# EAGLE board snesram (EAGLE 5.06), part 1 of 2
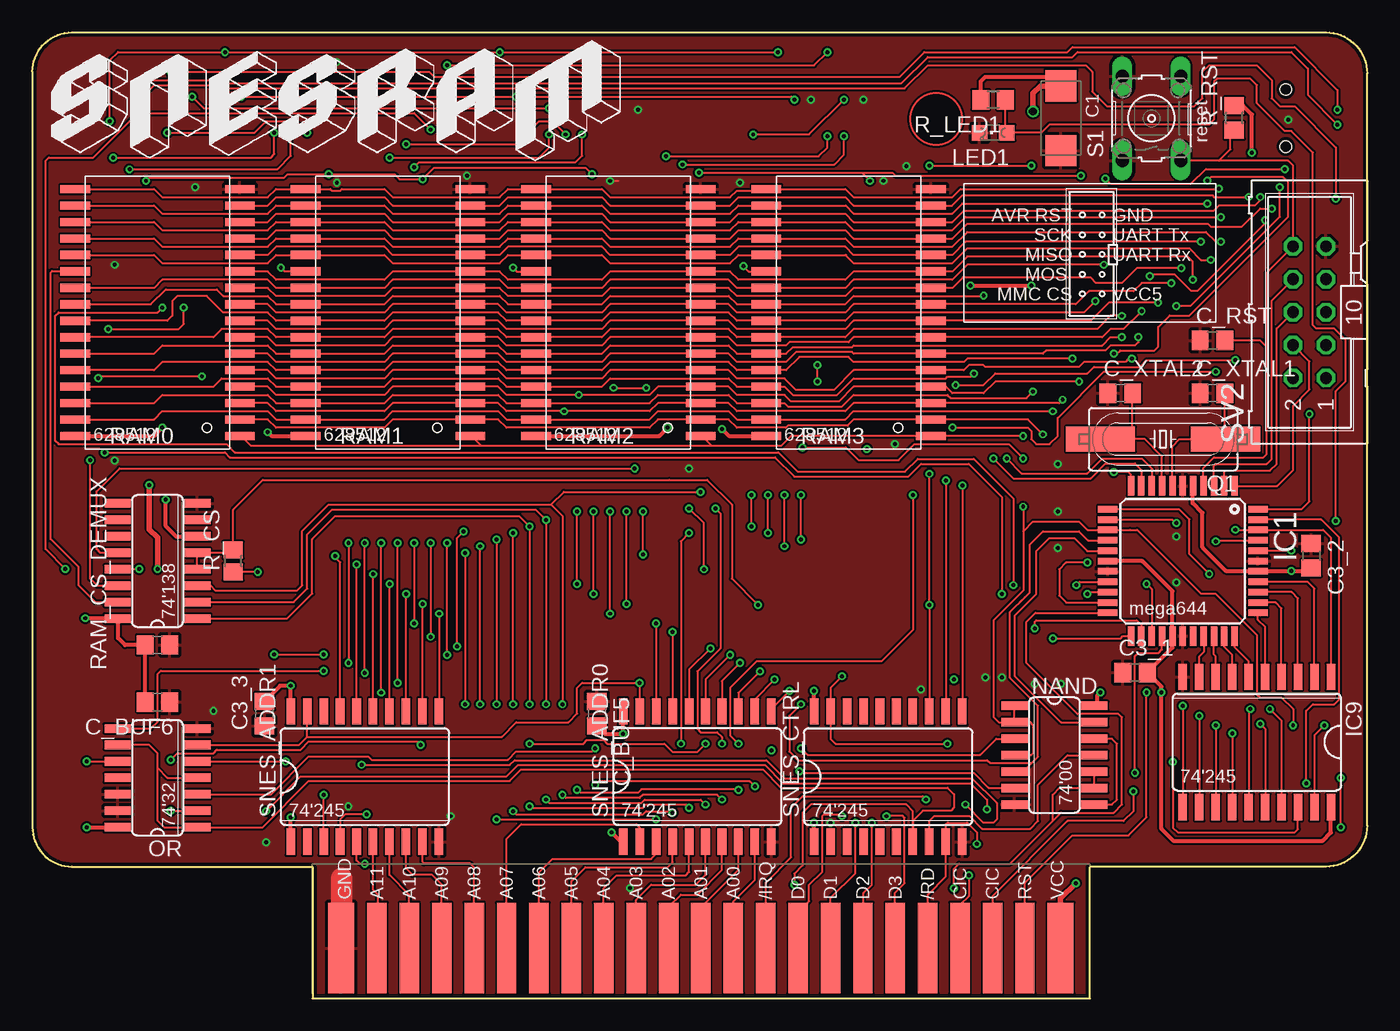
[diagram p0: board, top side]
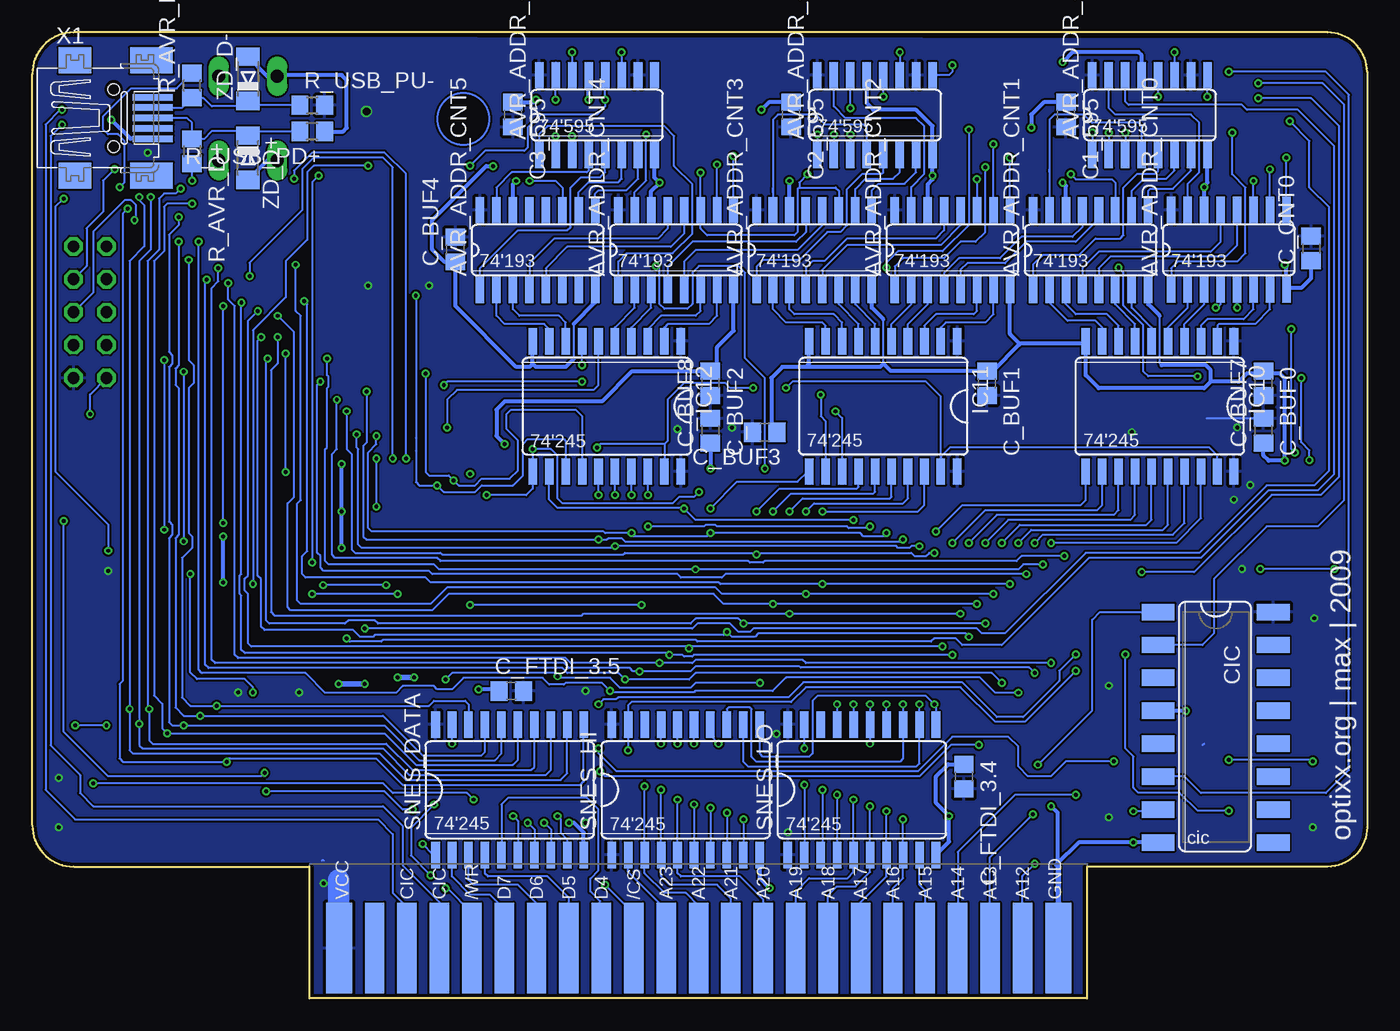
[diagram p1: board, bottom side, seen from below]

Size 103 x 74.55 mm. Coordinates in mm from the lower left corner, seen from the top.
Outline: 103,71.34 103,13.33 arc-90 99.82,10.16 81.66,10.16
Outline: 21.62,10.11 21.62,0 81.6,0 81.6,10.11
Outline: 21.59,10.16 3.05,10.16 arc-90 0,13.21 0,71.5 arc-90 3.05,74.55 99.82,74.55 arc-90 103,71.37
Copper layers (1*16): Top 0.035mm / dielectric 1.5mm / Bottom 0.035mm
Design rules "PropagandaPCB": minimum track width 6mil, minimum drill 10mil, track to track 6mil, track to pad 6mil, pad to pad 6mil, via to via 6mil, smd to smd 6mil, copper to edge 10mil, drill to drill 10mil, minimum pad ring 10mil, minimum via ring 6mil, stop-mask expansion 2mil, vias tented up to drill 100mil, thermal gap 10mil

## Footprints (pad centres in the part's own frame; a part is rotated, then mirrored left to right if it is on the bottom)
SO16 = smd 0.66 x 2.032: 1 -4.445,-3.073; 2 -3.175,-3.073; 3 -1.905,-3.073; 4 -0.635,-3.073; 5 0.635,-3.073; 6 1.905,-3.073; 7 3.175,-3.073; 8 4.445,-3.073; 9 4.445,3.073; 10 3.175,3.073; 11 1.905,3.073; 12 0.635,3.073; 13 -0.635,3.073; 14 -1.905,3.073; 15 -3.175,3.073; 16 -4.445,3.073
SMC_C = smd 2.4 x 2.4: + -2.5,0; - 2.5,0
C0805 = smd 1.3 x 1.5: 1 -0.95,0; 2 0.95,0
DIL16_SMD = smd 1.27 x 2.54: 1 -8.89,-4.445; 2 -6.35,-4.445; 3 -3.81,-4.445; 4 -1.27,-4.445; 5 1.27,-4.445; 6 3.81,-4.445; 7 6.35,-4.445; 8 8.89,-4.445; 9 8.89,4.445; 10 6.35,4.445; 11 3.81,4.445; 12 1.27,4.445; 13 -1.27,4.445; 14 -3.81,4.445; 15 -6.35,4.445; 16 -8.89,4.445
TQFP44 = smd 1.5 x 0.5: 1 -5.8,4; 2 -5.8,3.2; 3 -5.8,2.4; 4 -5.8,1.6; 5 -5.8,0.8; 6 -5.8,0; 7 -5.8,-0.8; 8 -5.8,-1.6; 9 -5.8,-2.4; 10 -5.8,-3.2; 11 -5.8,-4; 23 5.8,-4; 24 5.8,-3.2; 25 5.8,-2.4; 26 5.8,-1.6; 27 5.8,-0.8; 28 5.8,0; 29 5.8,0.8; 30 5.8,1.6; 31 5.8,2.4; 32 5.8,3.2; 33 5.8,4 | smd 0.5 x 1.5: 12 -4,-5.8; 13 -3.2,-5.8; 14 -2.4,-5.8; 15 -1.6,-5.8; 16 -0.8,-5.8; 17 0,-5.8; 18 0.8,-5.8; 19 1.6,-5.8; 20 2.4,-5.8; 21 3.2,-5.8; 22 4,-5.8; 34 4,5.8; 35 3.2,5.8; 36 2.4,5.8; 37 1.6,5.8; 38 0.8,5.8; 39 0,5.8; 40 -0.8,5.8; 41 -1.6,5.8; 42 -2.4,5.8; 43 -3.2,5.8; 44 -4,5.8
SO20W = smd 0.66 x 2.032: 1 -5.715,-5.029; 2 -4.445,-5.029; 3 -3.175,-5.029; 4 -1.905,-5.029; 5 -0.635,-5.029; 6 0.635,-5.029; 7 1.905,-5.029; 8 3.175,-5.029; 9 4.445,-5.029; 10 5.715,-5.029; 11 5.715,5.029; 12 4.445,5.029; 13 3.175,5.029; 14 1.905,5.029; 15 0.635,5.029; 16 -0.635,5.029; 17 -1.905,5.029; 18 -3.175,5.029; 19 -4.445,5.029; 20 -5.715,5.029
CHIPLED_0805 = smd 1.2 x 1.2: A 0,-1.05; C 0,1.05
SO14 = smd 0.66 x 2.032: 1 -3.81,-3.073; 2 -2.54,-3.073; 3 -1.27,-3.073; 4 0,-3.073; 5 1.27,-3.073; 6 2.54,-3.073; 7 3.81,-3.073; 8 3.81,3.073; 9 2.54,3.073; 10 1.27,3.073; 11 0,3.073; 12 -1.27,3.073; 13 -2.54,3.073; 14 -3.81,3.073
HC49UP = smd 5.334 x 1.93: 1 -4.826,0; 2 4.826,0
R0805 = smd 1.3 x 1.5: 1 -0.95,0; 2 0.95,0
R0805' = smd 1.3 x 1.5: 1 -0.85,0; 2 0.85,0
MEMORY-SAMSUNG-2_SOP-32 = smd 0.635 x 2.286: 1 -9.525,-6.35; 2 -8.255,-6.35; 3 -6.985,-6.35; 4 -5.715,-6.35; 5 -4.445,-6.35; 6 -3.175,-6.35; 7 -1.905,-6.35; 8 -0.635,-6.35; 9 0.635,-6.35; 10 1.905,-6.35; 11 3.175,-6.35; 12 4.445,-6.35; 13 5.715,-6.35; 14 6.985,-6.35; 15 8.255,-6.35; 16 9.525,-6.35; 17 9.525,6.35; 18 8.255,6.35; 19 6.985,6.35; 20 5.715,6.35; 21 4.445,6.35; 22 3.175,6.35; 23 1.905,6.35; 24 0.635,6.35; 25 -0.635,6.35; 26 -1.905,6.35; 27 -3.175,6.35; 28 -4.445,6.35; 29 -5.715,6.35; 30 -6.985,6.35; 31 -8.255,6.35; 32 -9.525,6.35
B3F-10XX = drill 1.016 long: 1 -3.251,2.261; 2 3.251,2.261; 3 -3.251,-2.261; 4 3.251,-2.261
ML10 = drill 0.914 octagon: 1 -5.08,-1.27; 2 -5.08,1.27; 3 -2.54,-1.27; 4 -2.54,1.27; 5 0,-1.27; 6 0,1.27; 7 2.54,-1.27; 8 2.54,1.27; 9 5.08,-1.27; 10 5.08,1.27
SNES_CON = smd 2 x 7: 5 2.25,3.5; 27 57.75,3.5 | smd 1.5 x 7: 6 5,3.5; 7 7.5,3.5; 8 10,3.5; 9 12.5,3.5; 10 15,3.5; 11 17.5,3.5; 12 20,3.5; 13 22.5,3.5; 14 25,3.5; 15 27.5,3.5; 16 30,3.5; 17 32.5,3.5; 18 35,3.5; 19 37.5,3.5; 20 40,3.5; 21 42.5,3.5; 22 45,3.5; 23 47.5,3.5; 24 50,3.5; 25 52.5,3.5; 26 55,3.5 | smd 2 x 7 bottom: 36 2.25,3.5; 58 57.75,3.5 | smd 1.5 x 7 bottom: 37 5,3.5; 38 7.5,3.5; 39 10,3.5; 40 12.5,3.5; 41 15,3.5; 42 17.5,3.5; 43 20,3.5; 44 22.5,3.5; 45 25,3.5; 46 27.5,3.5; 47 30,3.5; 48 32.5,3.5; 49 35,3.5; 50 37.5,3.5; 51 40,3.5; 52 42.5,3.5; 53 45,3.5; 54 47.5,3.5; 55 50,3.5; 56 52.5,3.5; 57 55,3.5
CON-CYPRESSINDUSTRIES_32005-201 = smd 0.5 x 3.1: 1 1.6,-9.027; 2 0.8,-9.027; 3 0,-9.027; 4 -0.8,-9.027; 5 -1.6,-9.027 | smd 2 x 2.5: M1 -4.45,-3.027; M2 4.45,-3.027 | smd 2 x 3.3: M3 4.45,-8.928; M4 -4.45,-8.928 | hole 0.9: 2.2,-6.027; -2.2,-6.027
MINIMELF = smd 1.4 x 1.8: A 1.7,0; C -1.7,0

## Placement (x,y rotation side)
AVR_ADDR_CNT0  40193D  [SO16]  10.67,57.77 0 bottom
AVR_ADDR_CNT1  40193D  [SO16]  21.34,57.75 0 bottom
AVR_ADDR_CNT2  40193D  [SO16]  32,57.75 0 bottom
AVR_ADDR_CNT3  40193D  [SO16]  42.67,57.75 0 bottom
AVR_ADDR_CNT4  40193D  [SO16]  53.34,57.75 0 bottom
AVR_ADDR_CNT5  40193D  [SO16]  64.01,57.75 0 bottom
AVR_ADDR_SREG0  74HCT595D  [SO16]  16.76,68.17 0 bottom
AVR_ADDR_SREG1  74HCT595D  [SO16]  37.97,68.17 0 bottom
AVR_ADDR_SREG2  74HCT595D  [SO16]  59.44,68.17 0 bottom
C1  [SMC_C]  79.38,67.91 270 top
C1_595  100n  [C0805]  23.24,68.2 270 bottom
C2_595  100n  [C0805]  44.45,68.2 270 bottom
C3_1  100n  [C0805]  85.09,25.15 0 top
C3_2  100n  [C0805]  98.68,34.16 270 top
C3_3  100n  [C0805]  17.91,21.97 90 top
C3_595  100n  [C0805]  65.91,68.2 270 bottom
C_BUF0  100n  [C0805]  8,47.47 270 bottom
C_BUF1  100n  [C0805]  29.34,47.47 270 bottom
C_BUF2  100n  [C0805]  50.67,47.47 270 bottom
C_BUF3  100n  [C0805]  46.48,43.69 180 bottom
C_BUF4  100n  [C0805]  70.36,57.78 90 bottom
C_BUF5  100n  [C0805]  43.56,21.97 270 top
C_BUF6  100n  [C0805]  9.65,22.86 180 top
C_BUF7  100n  [C0805]  8,43.81 90 bottom
C_BUF8  100n  [C0805]  50.67,43.81 90 bottom
C_CNT0  100n  [C0805]  4.32,57.88 90 bottom
C_DEMUX  100n  [C0805]  9.65,27.27 180 top
C_FTDI_3.4  100n  [C0805]  31.11,17.11 270 bottom
C_FTDI_3.5  100n  [C0805]  66.04,23.72 0 bottom
C_RST  47n  [C0805]  91.06,50.77 0 top
C_XTAL1  22p  [C0805]  91.06,46.7 0 top
C_XTAL2  22p  [C0805]  83.95,46.7 0 top
CIC  DIL16_SMD  [DIL16_SMD]  11.68,20.92 270 bottom
IC1  ATMEGA644A  [TQFP44]  88.77,33.75 270 top
IC9  74LS245DW  [SO20W]  94.49,19.78 180 top
IC10  74LS245DW  [SO20W]  16,45.69 180 bottom
IC11  74LS245DW  [SO20W]  37.34,45.69 180 bottom
IC12  74LS245DW  [SO20W]  58.67,45.69 180 bottom
LED1  2-4mA  [CHIPLED_0805]  74.14,66.8 90 top
NAND  74S00D  [SO14]  78.87,18.76 270 top
OR  74HC32D  [SO14]  9.65,17.02 90 top
Q1  20MHz  [HC49UP]  87.25,43.15 180 top
R_AVR_D+  68  [R0805]  90.68,65.37 270 bottom
R_AVR_D-  68  [R0805]  90.68,70.45 90 bottom
R_CS  200  [R0805']  15.49,33.75 90 top
R_LED1  1k6  [R0805]  74.14,69.34 180 top
R_RST  4k7  [R0805]  92.74,67.94 90 top
R_USB_PD+  1M  [R0805]  81.41,66.9 180 bottom
R_USB_PU-  1k5  [R0805]  81.41,68.93 0 bottom
RAM0  KM628512-XX  [MEMORY-SAMSUNG-2_SOP-32]  9.65,52.93 90 top
RAM1  KM628512-XX  [MEMORY-SAMSUNG-2_SOP-32]  27.43,52.93 90 top
RAM2  KM628512-XX  [MEMORY-SAMSUNG-2_SOP-32]  45.21,52.93 90 top
RAM3  KM628512-XX  [MEMORY-SAMSUNG-2_SOP-32]  62.99,52.93 90 top
RAM_CS_DEMUX  74LS138D  [SO16]  9.65,33.75 90 top
S1  [B3F-10XX]  86.36,67.91 90 top
SNES_ADDR0  74LS245DW  [SO20W]  51.31,17.11 0 top
SNES_ADDR1  74LS245DW  [SO20W]  25.65,17.11 0 top
SNES_CTRL  74LS245DW  [SO20W]  66.04,17.11 0 top
SNES_DATA  74LS245DW  [SO20W]  66.17,16.1 0 bottom
SNES_HI  74LS245DW  [SO20W]  52.58,16.1 0 bottom
SNES_LO  74LS245DW  [SO20W]  38.99,16.1 0 bottom
SV2  [ML10]  98.55,52.96 90 top
U$3  SNES_CON_FRONT  [SNES_CON]  21.59,0.38 0 top
X1  MINI-USB  [CON-CYPRESSINDUSTRIES_32005-201]  102.74,67.94 90 bottom
ZD_D+  3.6V  [MINIMELF]  86.36,64.86 270 bottom
ZD_D-  3.6V  [MINIMELF]  86.36,70.96 90 bottom

## Library data of the parts
AVR_ADDR_CNT0 AVR_ADDR_CNT1-AVR_ADDR_CNT5 = 40xx
AVR_ADDR_SREG0 AVR_ADDR_SREG1 AVR_ADDR_SREG2 IC9-IC12 OR RAM_CS_DEMUX SNES_ADDR0 SNES_ADDR1 SNES_CTRL SNES_DATA SNES_HI SNES_LO = 74xx-eu
C1 C1_595 C2_595 C3_1-C3_3 C3_595 C_BUF0 C_BUF1-C_BUF8 C_CNT0 C_DEMUX C_FTDI_3.4 C_FTDI_3.5 C_RST C_XTAL1 C_XTAL2 R_AVR_D+ R_AVR_D- R_LED1 R_RST R_USB_PD+ R_USB_PU- = rcl
CIC = ic-package
IC1 = atmel
LED1 = led
NAND = 74xx-us
Q1 = crystal
R_CS = resistor
RAM0 RAM1-RAM3 X1 = snesram
S1 = switch-omron
SV2 = con-harting-ml
U$3 = snes_con
ZD_D+ ZD_D- = diode

## Nets
A0: IC10.16 RAM0.12 RAM1.12 RAM2.12 RAM3.12 SNES_ADDR0.11
A1: IC10.15 RAM0.11 RAM1.11 RAM2.11 RAM3.11 SNES_ADDR0.12
A2: IC10.17 RAM0.10 RAM1.10 RAM2.10 RAM3.10 SNES_ADDR0.13
A3: IC10.18 RAM0.9 RAM1.9 RAM2.9 RAM3.9 SNES_ADDR0.14
A4: IC10.12 RAM0.8 RAM1.8 RAM2.8 RAM3.8 SNES_ADDR0.15
A5: IC10.11 RAM0.7 RAM1.7 RAM2.7 RAM3.7 SNES_ADDR0.16
A6: IC10.13 RAM0.6 RAM1.6 RAM2.6 RAM3.6 SNES_ADDR0.17
A7: IC10.14 RAM0.5 RAM1.5 RAM2.5 RAM3.5 SNES_ADDR0.18
A8: IC11.16 RAM0.27 RAM1.27 RAM2.27 RAM3.27 SNES_ADDR1.11
A9: IC11.15 RAM0.26 RAM1.26 RAM2.26 RAM3.26 SNES_ADDR1.12
A10: IC11.17 RAM0.23 RAM1.23 RAM2.23 RAM3.23 SNES_ADDR1.13
A11: IC11.18 RAM0.25 RAM1.25 RAM2.25 RAM3.25 SNES_ADDR1.14
A12: IC11.12 RAM0.4 RAM1.4 RAM2.4 RAM3.4 SNES_ADDR1.15
A13: IC11.11 RAM0.28 RAM1.28 RAM2.28 RAM3.28 SNES_ADDR1.16
A14: IC11.13 RAM0.3 RAM1.3 RAM2.3 RAM3.3 SNES_ADDR1.17
A15: IC11.14 RAM0.31 RAM1.31 RAM2.31 RAM3.31 SNES_HI.11 SNES_LO.11
A16: IC12.16 RAM0.2 RAM1.2 RAM2.2 RAM3.2 SNES_HI.12 SNES_LO.12
A17: IC12.15 RAM0.30 RAM1.30 RAM2.30 RAM3.30 SNES_HI.13 SNES_LO.13
A18: IC12.17 RAM0.1 RAM1.1 RAM2.1 RAM3.1 SNES_HI.14 SNES_LO.14
A19: IC12.18 RAM_CS_DEMUX.1 SNES_HI.15 SNES_LO.15
A20: IC12.12 RAM_CS_DEMUX.2 SNES_HI.16 SNES_LO.16
A21: IC12.11 RAM_CS_DEMUX.3 SNES_HI.17 SNES_LO.17
AVR/SNES_SW: IC1.14 IC9.19 IC10.19 IC11.19 IC12.19 NAND.1 NAND.2 NAND.4
AVR/SNES_SW_INV: OR.6 SNES_ADDR0.19 SNES_ADDR1.19 SNES_CTRL.19 SNES_DATA.19
AVR_ADDR_DWN: AVR_ADDR_CNT0.4 IC1.20
AVR_ADDR_LATCH: AVR_ADDR_SREG0.12 AVR_ADDR_SREG1.12 AVR_ADDR_SREG2.12 IC1.25
AVR_ADDR_LOAD: AVR_ADDR_CNT0.11 AVR_ADDR_CNT1.11 AVR_ADDR_CNT2.11 AVR_ADDR_CNT3.11 AVR_ADDR_CNT4.11 AVR_ADDR_CNT5.11 IC1.21
AVR_ADDR_SCK: AVR_ADDR_SREG0.11 AVR_ADDR_SREG1.11 AVR_ADDR_SREG2.11 IC1.24
AVR_ADDR_SER: AVR_ADDR_SREG0.14 IC1.23
AVR_ADDR_UP: AVR_ADDR_CNT0.5 IC1.19
AVR_CS/: IC1.40 R_CS.1
AVR_D0: IC1.37 IC9.2
AVR_D1: IC1.36 IC9.3
AVR_D2: IC1.35 IC9.4
AVR_D3: IC1.34 IC9.5
AVR_D4: IC1.33 IC9.6
AVR_D5: IC1.32 IC9.7
AVR_D6: IC1.31 IC9.8
AVR_D7: IC1.30 IC9.9
AVR_D+: R_AVR_D+.1 R_USB_PD+.2 X1.3 ZD_D+.C
AVR_D-: R_AVR_D-.1 R_USB_PU-.1 X1.2 ZD_D-.C
AVR_RD/: IC1.42 IC9.1 IC12.7
AVR_SNES_WR_EN: IC1.16 NAND.13
AVR_UART_RX: IC1.9 SV2.5
AVR_UART_TX: IC1.10 SV2.7
AVR_WR/: IC1.41 IC12.6
CS/: R_CS.2 RAM_CS_DEMUX.4 RAM_CS_DEMUX.5 SNES_CTRL.13
CS_RAM0: RAM0.22 RAM_CS_DEMUX.15
CS_RAM1: RAM1.22 RAM_CS_DEMUX.14
CS_RAM2: RAM2.22 RAM_CS_DEMUX.13
CS_RAM3: RAM3.22 RAM_CS_DEMUX.12
D0: IC9.18 RAM0.13 RAM1.13 RAM2.13 RAM3.13 SNES_DATA.11
D1: IC9.17 RAM0.14 RAM1.14 RAM2.14 RAM3.14 SNES_DATA.12
D2: IC9.16 RAM0.15 RAM1.15 RAM2.15 RAM3.15 SNES_DATA.13
D3: IC9.15 RAM0.17 RAM1.17 RAM2.17 RAM3.17 SNES_DATA.14
D4: IC9.14 RAM0.18 RAM1.18 RAM2.18 RAM3.18 SNES_DATA.15
D5: IC9.13 RAM0.19 RAM1.19 RAM2.19 RAM3.19 SNES_DATA.16
D6: IC9.12 RAM0.20 RAM1.20 RAM2.20 RAM3.20 SNES_DATA.17
D7: IC9.11 RAM0.21 RAM1.21 RAM2.21 RAM3.21 SNES_DATA.18
GND: AVR_ADDR_CNT0.8 AVR_ADDR_CNT0.14 AVR_ADDR_CNT1.8 AVR_ADDR_CNT1.14 AVR_ADDR_CNT2.8 AVR_ADDR_CNT2.14 AVR_ADDR_CNT3.8 AVR_ADDR_CNT3.14 AVR_ADDR_CNT4.8 AVR_ADDR_CNT4.14 AVR_ADDR_CNT5.8 AVR_ADDR_CNT5.14 AVR_ADDR_SREG0.8 AVR_ADDR_SREG0.13 AVR_ADDR_SREG1.8 AVR_ADDR_SREG1.13 AVR_ADDR_SREG2.8 AVR_ADDR_SREG2.13 C1.- C1_595.1 C2_595.1 C3_1.1 C3_2.1 C3_3.1 C3_595.1 C_BUF0.1 C_BUF1.1 C_BUF2.1 C_BUF3.1 C_BUF4.1 C_BUF5.1 C_BUF6.1 C_BUF7.1 C_BUF8.1 C_CNT0.1 C_DEMUX.1 C_FTDI_3.4.1 C_FTDI_3.5.1 C_RST.1 C_XTAL1.1 C_XTAL2.1 CIC.4 CIC.8 IC1.6 IC1.18 IC1.28 IC1.39 IC9.10 IC10.10 IC11.10 IC12.10 LED1.C NAND.7 OR.7 OR.12 OR.13 R_USB_PD+.1 RAM0.16 RAM1.16 RAM2.16 RAM3.16 RAM_CS_DEMUX.8 S1.1 S1.2 SNES_ADDR0.10 SNES_ADDR1.10 SNES_CTRL.10 SNES_DATA.10 SNES_HI.10 SNES_LO.10 SV2.9 U$3.5 U$3.36 X1.5 ZD_D+.A ZD_D-.A
HI/LOROM_SW: IC1.15 NAND.5 OR.2
HI/LOROM_SW_INV: OR.8 SNES_HI.19
ISP_MISO: IC1.2 SV2.6
ISP_MOSI: IC1.1 SV2.4
ISP_RST: C_RST.2 IC1.4 R_RST.1 S1.3 SV2.10
ISP_SCK: IC1.3 SV2.8
LED: IC1.26 LED1.A R_LED1.1
MMC_CS: IC1.44 SV2.2
N1337: OR.3 SNES_LO.19
N$1: AVR_ADDR_CNT0.7 IC10.2
N$2: AVR_ADDR_CNT2.3 IC11.4
N$3: AVR_ADDR_CNT0.2 IC10.5
N$4: AVR_ADDR_CNT0.3 IC10.4
N$5: AVR_ADDR_CNT1.7 IC10.6
N$6: AVR_ADDR_CNT1.6 IC10.7
N$7: AVR_ADDR_CNT1.2 IC10.9
N$8: AVR_ADDR_CNT1.3 IC10.8
N$9: AVR_ADDR_CNT0.12 AVR_ADDR_CNT1.5
N$10: AVR_ADDR_CNT0.13 AVR_ADDR_CNT1.4
N$11: AVR_ADDR_SREG0.9 AVR_ADDR_SREG1.14
N$12: AVR_ADDR_CNT0.15 AVR_ADDR_SREG0.15
N$13: AVR_ADDR_CNT0.1 AVR_ADDR_SREG0.1
N$14: AVR_ADDR_CNT0.10 AVR_ADDR_SREG0.2
N$15: AVR_ADDR_CNT0.9 AVR_ADDR_SREG0.3
N$16: AVR_ADDR_CNT1.15 AVR_ADDR_SREG0.4
N$17: AVR_ADDR_CNT1.1 AVR_ADDR_SREG0.5
N$18: AVR_ADDR_CNT1.10 AVR_ADDR_SREG0.6
N$19: AVR_ADDR_CNT1.9 AVR_ADDR_SREG0.7
N$20: AVR_ADDR_CNT3.9 AVR_ADDR_SREG1.7
N$21: AVR_ADDR_CNT2.1 AVR_ADDR_SREG1.1
N$22: AVR_ADDR_CNT2.10 AVR_ADDR_SREG1.2
N$23: AVR_ADDR_CNT2.9 AVR_ADDR_SREG1.3
N$24: AVR_ADDR_CNT1.12 AVR_ADDR_CNT2.5
N$25: AVR_ADDR_CNT1.13 AVR_ADDR_CNT2.4
N$26: AVR_ADDR_CNT2.2 IC11.5
N$27: AVR_ADDR_CNT2.6 IC11.3
N$28: AVR_ADDR_CNT2.7 IC11.2
N$29: AVR_ADDR_CNT4.3 IC12.4
N$30: AVR_ADDR_CNT3.15 AVR_ADDR_SREG1.4
N$31: AVR_ADDR_CNT3.1 AVR_ADDR_SREG1.5
N$32: AVR_ADDR_CNT3.10 AVR_ADDR_SREG1.6
N$33: AVR_ADDR_CNT3.3 IC11.8
N$34: AVR_ADDR_CNT3.2 IC11.9
N$35: AVR_ADDR_CNT3.6 IC11.7
N$36: AVR_ADDR_CNT3.7 IC11.6
N$37: AVR_ADDR_CNT2.15 AVR_ADDR_SREG1.15
N$38: AVR_ADDR_SREG1.9 AVR_ADDR_SREG2.14
N$39: AVR_ADDR_CNT2.12 AVR_ADDR_CNT3.5
N$40: AVR_ADDR_CNT2.13 AVR_ADDR_CNT3.4
N$41: AVR_ADDR_CNT3.12 AVR_ADDR_CNT4.5
N$42: AVR_ADDR_CNT3.13 AVR_ADDR_CNT4.4
N$43: AVR_ADDR_CNT4.2 IC12.5
N$44: AVR_ADDR_CNT4.6 IC12.3
N$45: AVR_ADDR_CNT4.7 IC12.2
N$46: NAND.8 NAND.12
N$47: AVR_ADDR_CNT4.12 AVR_ADDR_CNT5.5
N$48: AVR_ADDR_CNT4.13 AVR_ADDR_CNT5.4
N$49: AVR_ADDR_CNT5.3 IC12.8
N$50: AVR_ADDR_CNT5.2 IC12.9
N$51: NAND.3 OR.5
N$52: NAND.11 SNES_CTRL.8
N$53: AVR_ADDR_CNT4.15 AVR_ADDR_SREG2.15
N$54: AVR_ADDR_CNT4.1 AVR_ADDR_SREG2.1
N$55: AVR_ADDR_CNT4.10 AVR_ADDR_SREG2.2
N$56: AVR_ADDR_CNT4.9 AVR_ADDR_SREG2.3
N$57: AVR_ADDR_CNT5.15 AVR_ADDR_SREG2.4
N$58: AVR_ADDR_CNT5.1 AVR_ADDR_SREG2.5
N$59: AVR_ADDR_CNT5.10 AVR_ADDR_SREG2.6
N$60: AVR_ADDR_CNT5.9 AVR_ADDR_SREG2.7
N$61: IC1.13 R_AVR_D-.2
N$62: IC1.11 R_AVR_D+.2
N$63: C_XTAL2.2 IC1.8 Q1.2
N$64: AVR_ADDR_CNT0.6 IC10.3
N$65: NAND.6 OR.10
N$68: C_XTAL1.2 IC1.7 Q1.1
OE/: IC12.13 RAM0.24 RAM1.24 RAM2.24 RAM3.24 SNES_CTRL.11
SNES_PIN06_A11: SNES_ADDR1.6 U$3.6
SNES_PIN07_A10: SNES_ADDR1.7 U$3.7
SNES_PIN08_A9: SNES_ADDR1.8 U$3.8
SNES_PIN09_A8: SNES_ADDR1.9 U$3.9
SNES_PIN10_A7: SNES_ADDR0.2 U$3.10
SNES_PIN11_A6: SNES_ADDR0.3 U$3.11
SNES_PIN12_A5: SNES_ADDR0.4 U$3.12
SNES_PIN13_A4: SNES_ADDR0.5 U$3.13
SNES_PIN14_A3: SNES_ADDR0.6 U$3.14
SNES_PIN15_A2: SNES_ADDR0.7 U$3.15
SNES_PIN16_A1: SNES_ADDR0.8 U$3.16
SNES_PIN17_A0: SNES_ADDR0.9 U$3.17
SNES_PIN18_/IRQ: IC1.43 U$3.18
SNES_PIN19_D0: SNES_DATA.9 U$3.19
SNES_PIN20_D1: SNES_DATA.8 U$3.20
SNES_PIN21_D2: SNES_DATA.7 U$3.21
SNES_PIN22_D3: SNES_DATA.6 U$3.22
SNES_PIN23_/RD: SNES_CTRL.9 SNES_DATA.1 U$3.23
SNES_PIN24_CICO1: CIC.1 U$3.24
SNES_PIN25_CICI7: CIC.7 U$3.25
SNES_PIN37_A12: SNES_ADDR1.5 U$3.37
SNES_PIN38_A13: SNES_ADDR1.4 U$3.38
SNES_PIN39_A14: SNES_ADDR1.3 U$3.39
SNES_PIN40_A15: SNES_LO.9 U$3.40
SNES_PIN41_BA0: SNES_HI.9 SNES_LO.8 U$3.41
SNES_PIN42_BA1: SNES_HI.8 SNES_LO.7 U$3.42
SNES_PIN43_BA2: SNES_HI.7 SNES_LO.6 U$3.43
SNES_PIN44_BA3: SNES_HI.6 SNES_LO.5 U$3.44
SNES_PIN45_BA4: SNES_HI.5 SNES_LO.4 U$3.45
SNES_PIN46_BA5: SNES_HI.4 SNES_LO.3 U$3.46
SNES_PIN47_BA6: SNES_HI.3 SNES_LO.2 U$3.47
SNES_PIN48_BA7: SNES_HI.2 U$3.48
SNES_PIN49_/CS: OR.1 OR.4 OR.9 SNES_CTRL.7 U$3.49
SNES_PIN50_D4: SNES_DATA.5 U$3.50
SNES_PIN51_D5: SNES_DATA.4 U$3.51
SNES_PIN52_D6: SNES_DATA.3 U$3.52
SNES_PIN53_D7: SNES_DATA.2 U$3.53
SNES_PIN54_/WR: IC1.22 NAND.9 NAND.10 U$3.54
SNES_PIN55_CICO2: CIC.2 U$3.55
SNES_PIN56_CICI6: CIC.6 U$3.56
SNES_PIN_26_RST: IC1.12 U$3.26
VCC: AVR_ADDR_CNT0.16 AVR_ADDR_CNT1.16 AVR_ADDR_CNT2.16 AVR_ADDR_CNT3.16 AVR_ADDR_CNT4.16 AVR_ADDR_CNT5.16 AVR_ADDR_SREG0.10 AVR_ADDR_SREG0.16 AVR_ADDR_SREG1.10 AVR_ADDR_SREG1.16 AVR_ADDR_SREG2.10 AVR_ADDR_SREG2.16 C1.+ C1_595.2 C2_595.2 C3_1.2 C3_2.2 C3_3.2 C3_595.2 C_BUF0.2 C_BUF1.2 C_BUF2.2 C_BUF3.2 C_BUF4.2 C_BUF5.2 C_BUF6.2 C_BUF7.2 C_BUF8.2 C_CNT0.2 C_DEMUX.2 C_FTDI_3.4.2 C_FTDI_3.5.2 CIC.16 IC1.5 IC1.17 IC1.27 IC1.38 IC9.20 IC10.1 IC10.20 IC11.1 IC11.20 IC12.1 IC12.20 NAND.14 OR.14 R_LED1.2 R_RST.2 R_USB_PU-.2 RAM0.32 RAM1.32 RAM2.32 RAM3.32 RAM_CS_DEMUX.6 RAM_CS_DEMUX.16 SNES_ADDR0.1 SNES_ADDR0.20 SNES_ADDR1.1 SNES_ADDR1.20 SNES_CTRL.1 SNES_CTRL.20 SNES_DATA.20 SNES_HI.1 SNES_HI.20 SNES_LO.1 SNES_LO.20 SV2.1 U$3.27 U$3.58
WE/: IC12.14 RAM0.29 RAM1.29 RAM2.29 RAM3.29 SNES_CTRL.12

## Tracks (layer width: path | path; a pad name or v marks a point on that pad's centre or on a via)
A0  (via drill 0.3, 0.3 pad 0.61)
  Top 0.152: v90.17,58.39 72.01,58.39 70.99,57.37 RAM3.12 63.37,57.37 62.74,58.01 54.48,58.01 53.85,57.37 RAM2.12 44.58,57.37 43.94,58.01 36.7,58.01 36.07,57.37 RAM1.12 27.81,57.37 27.18,58.01 18.8,58.01 18.16,57.37 RAM0.12 | v26.92,23.59 v26.92,35.15 | SNES_ADDR0.11 57.02,22.32 v58.42,23.72
  Bottom 0.152: v90.17,58.39 90.17,25.37 89.92,25.11 81.92,25.11 80.39,23.59 74.93,23.59 74.42,24.1 72.01,24.1 71.75,23.84 70.61,23.84 69.72,24.73 63.63,24.73 63.12,24.22 61.98,24.22 61.85,24.35 59.05,24.35 v58.42,23.72 58.33,23.62 51.94,23.62 51.85,23.72 45.88,23.72 44.83,24.76 29.88,24.76 28.7,23.59 v26.92,23.59 | IC10.16 15.37,36.54 15.75,36.16 25.91,36.16 v26.92,35.15
A1  (via drill 0.3, 0.3 pad 0.61)
  Top 0.152: v89.53,55.47 89.53,56.86 89.15,57.24 72.14,57.24 70.99,56.1 RAM3.11 63.37,56.1 62.74,55.47 54.48,55.47 53.85,56.1 RAM2.11 44.58,56.1 43.94,55.47 36.7,55.47 36.07,56.1 RAM1.11 27.81,56.1 27.18,55.47 18.8,55.47 18.16,56.1 RAM0.11 | v28.19,24.35 v28.19,35.15 | SNES_ADDR0.12 55.75,23.08 v57.28,24.61
  Bottom 0.152: v89.53,55.47 89.66,55.34 89.66,25.75 89.41,25.49 62.1,25.49 61.72,25.11 57.78,25.11 v57.28,24.61 52.32,24.61 51.82,25.11 28.96,25.11 v28.19,24.35 | IC10.15 16.64,36.92 17.02,36.54 26.8,36.54 v28.19,35.15
A2  (via drill 0.3, 0.3 pad 0.61)
  Top 0.152: v88.65,56.36 85.22,56.36 84.07,55.21 82.07,55.21 81.66,55.63 71.79,55.63 70.99,54.83 RAM3.10 63.37,54.83 62.74,54.2 54.36,54.2 53.72,54.83 RAM2.10 44.58,54.83 43.94,54.2 36.7,54.2 36.07,54.83 RAM1.10 27.81,54.83 27.18,54.2 18.8,54.2 18.16,54.83 RAM0.10 | v25.65,25.11 v25.65,35.15 | SNES_ADDR0.13 54.48,23.59 v56.13,25.24
  Bottom 0.152: v88.65,56.36 88.65,55.34 89.15,54.83 89.15,26.13 88.9,25.88 61.98,25.88 61.59,25.49 56.9,25.49 56.64,25.24 v56.13,25.24 52.2,25.24 51.82,25.62 43.81,25.62 43.72,25.53 26.07,25.53 v25.65,25.11 | IC10.17 14.1,36.67 14.99,35.78 25.02,35.78 v25.65,35.15
A3  (via drill 0.3, 0.3 pad 0.61)
  Top 0.152: v87.88,55.21 85.6,55.21 84.96,54.58 81.53,54.58 80.52,53.56 RAM3.9 63.37,53.56 62.74,52.93 54.36,52.93 53.72,53.56 RAM2.9 44.58,53.56 43.94,52.93 36.58,52.93 35.94,53.56 RAM1.9 27.81,53.56 27.18,52.93 18.8,52.93 18.16,53.56 RAM0.9 | v24.38,35.15 v24.38,25.88 | SNES_ADDR0.14 53.21,24.48 v54.61,25.88
  Bottom 0.152: v87.88,55.21 87.88,53.94 87.38,53.43 87.38,26.51 87.12,26.26 61.85,26.26 61.47,25.88 v54.61,25.88 52.07,25.88 51.82,26.13 43.56,26.13 43.31,25.88 v24.38,25.88 | v24.38,35.15 14.73,35.15 12.83,37.05 IC10.18
A4  (via drill 0.3, 0.3 pad 0.61)
  Top 0.152: v86.87,53.69 83.06,53.69 81.66,52.29 RAM3.8 63.37,52.29 62.74,51.66 54.36,51.66 53.72,52.29 RAM2.8 44.58,52.29 43.94,51.66 36.58,51.66 35.94,52.29 RAM1.8 27.81,52.29 27.18,51.66 18.8,51.66 18.16,52.29 RAM0.8 | v32,26.51 v32,35.15 | 53.72,26.51 v53.85,26.51 51.94,24.61 SNES_ADDR0.15
  Bottom 0.152: 86.87,53.82 v86.87,53.69 86.87,32.73 87,32.61 87,31.21 86.87,31.08 86.87,26.89 86.61,26.64 53.98,26.64 v53.85,26.51 52.83,26.51 52.7,26.38 52.07,26.38 51.94,26.51 v32,26.51 | IC10.12 20.45,38.07 20.83,37.69 29.46,37.69 v32,35.15
A5  (via drill 0.3, 0.3 pad 0.61)
  Top 0.152: v85.6,53.05 84.2,51.66 83.19,51.66 82.55,51.02 RAM3.7 63.37,51.02 62.99,50.64 58.42,50.64 58.17,50.39 54.36,50.39 53.72,51.02 RAM2.7 44.58,51.02 43.94,50.39 36.58,50.39 35.94,51.02 RAM1.7 27.81,51.02 27.18,50.39 18.8,50.39 18.16,51.02 RAM0.7 | v33.27,36.04 32.77,35.53 v32.77,27.15 | SNES_ADDR0.16 50.67,25.37 v52.32,27.02
  Bottom 0.152: v32.77,27.15 52.2,27.15 v52.32,27.02 52.32,27.15 86.11,27.15 86.36,27.4 86.36,31.21 86.61,31.46 86.61,32.38 86.36,32.64 86.36,52.29 v85.6,53.05 | IC10.11 21.72,38.45 22.1,38.07 31.24,38.07 v33.27,36.04
A6  (via drill 0.3, 0.3 pad 0.61)
  Top 0.152: v85.34,51.02 85.34,50.64 85.09,50.39 83.19,50.39 82.8,50.01 78.23,50.01 77.98,49.75 RAM3.6 63.37,49.75 63.25,49.88 58.93,49.88 58.17,49.12 54.36,49.12 53.72,49.75 RAM2.6 44.58,49.75 43.94,49.12 36.58,49.12 35.94,49.75 RAM1.6 27.81,49.75 27.18,49.12 18.8,49.12 18.16,49.75 RAM0.6 | v30.73,35.15 v30.73,27.91 | v49.4,28.29 SNES_ADDR0.17
  Bottom 0.152: v85.34,51.02 85.6,50.77 85.6,32.61 85.34,32.35 85.34,28.67 85.09,28.42 78.23,28.42 77.72,27.91 76.71,27.91 76.58,28.03 49.66,28.03 v49.4,28.29 49.02,27.91 47.24,27.91 46.99,28.16 30.99,28.16 v30.73,27.91 | IC10.13 19.18,37.69 19.56,37.31 28.57,37.31 v30.73,35.15
A7  (via drill 0.3, 0.3 pad 0.61)
  Top 0.152: v29.46,35.15 v29.46,28.92 | v84.84,49.37 84.58,49.37 84.33,49.12 81.15,49.12 80.77,48.74 73.53,48.74 73.41,48.86 72.26,48.86 71.88,48.48 RAM3.5 63.37,48.48 61.85,46.96 58.93,46.96 58.04,47.85 54.36,47.85 53.72,48.48 RAM2.5 44.58,48.48 43.94,47.85 36.58,47.85 35.94,48.48 RAM1.5 27.81,48.48 27.18,47.85 18.8,47.85 18.16,48.48 RAM0.5 | v48.13,28.92 SNES_ADDR0.18
  Bottom 0.152: v84.84,49.37 84.96,49.24 84.96,29.18 84.71,28.92 78.87,28.92 78.61,29.18 76.58,29.18 76.33,28.92 52.2,28.92 51.82,29.3 48.51,29.3 v48.13,28.92 v29.46,28.92 | IC10.14 17.91,37.31 18.29,36.92 27.69,36.92 v29.46,35.15
A8  (via drill 0.3, 0.3 pad 0.61)
  Top 0.152: v84.07,51.02 83.19,51.02 82.55,50.39 63.37,50.39 63.25,50.26 58.67,50.26 58.17,49.75 RAM3.27 54.36,49.75 53.72,50.39 44.58,50.39 43.94,49.75 RAM2.27 36.58,49.75 35.94,50.39 27.81,50.39 27.18,49.75 RAM1.27 18.8,49.75 18.16,50.39 10.03,50.39 9.4,49.75 RAM0.27 | v44.58,29.69 v44.58,37.56 | v31.37,29.69 SNES_ADDR1.11
  Bottom 0.152: v84.07,51.02 84.07,48.99 84.58,48.48 84.58,29.81 84.33,29.56 60.58,29.56 60.45,29.69 v44.58,29.69 v31.37,29.69 | IC11.16 36.7,38.7 36.83,38.58 43.56,38.58 v44.58,37.56
A9  (via drill 0.3, 0.3 pad 0.61)
  Top 0.152: v45.85,30.45 v45.85,37.56 | SNES_ADDR1.12 v30.1,30.45 | RAM0.26 13.97,51.02 14.61,51.66 18.16,51.66 18.8,51.02 RAM1.26 27.18,51.02 27.81,51.66 35.94,51.66 36.58,51.02 RAM2.26 43.94,51.02 44.58,51.66 53.72,51.66 54.36,51.02 RAM3.26 62.74,51.02 63.37,51.66 82.17,51.66 83.19,52.67 v84.07,52.67
  Bottom 0.152: v84.07,52.67 82.8,51.4 82.8,38.7 83.31,38.19 83.31,30.19 83.06,29.94 72.14,29.94 70.87,31.21 50.42,31.21 49.66,30.45 v45.85,30.45 v30.1,30.45 | IC11.15 37.97,39.08 38.1,38.96 44.45,38.96 v45.85,37.56
A10  (via drill 0.3, 0.3 pad 0.61)
  Top 0.152: v82.68,56.61 72.14,56.61 70.99,55.47 63.37,55.47 62.74,54.83 RAM3.23 54.36,54.83 53.72,55.47 44.58,55.47 43.94,54.83 RAM2.23 36.7,54.83 36.07,55.47 27.81,55.47 27.18,54.83 RAM1.23 18.8,54.83 18.16,55.47 10.03,55.47 9.4,54.83 RAM0.23 | v43.31,31.21 v43.31,37.56 | SNES_ADDR1.13 v28.83,31.21
  Bottom 0.152: v82.68,56.61 82.68,53.05 82.3,52.67 82.3,38.45 82.55,38.19 82.55,30.7 82.3,30.45 72.26,30.45 70.99,31.72 50.29,31.72 49.78,31.21 v43.31,31.21 v28.83,31.21 | IC11.17 35.43,38.58 35.81,38.19 42.67,38.19 v43.31,37.56
A11  (via drill 0.3, 0.3 pad 0.61)
  Top 0.152: v82.04,53.82 81.15,52.93 63.37,52.93 62.74,52.29 RAM3.25 54.36,52.29 53.72,52.93 44.58,52.93 43.94,52.29 RAM2.25 36.58,52.29 35.94,52.93 27.81,52.93 27.18,52.29 RAM1.25 18.8,52.29 18.16,52.93 14.73,52.93 13.46,54.2 11.18,54.2 10.79,53.82 10.79,52.67 10.41,52.29 RAM0.25 | v42.04,31.97 v42.04,37.56 | SNES_ADDR1.14 v27.56,31.97
  Bottom 0.152: v82.04,53.82 81.79,53.56 81.79,34.51 82.17,34.13 82.17,32.73 81.92,32.48 72.64,32.48 72.26,32.1 50.04,32.1 49.91,31.97 v42.04,31.97 v27.56,31.97 | v42.04,37.56 34.67,37.56 34.16,38.07 IC11.18
A12  (via drill 0.3, 0.3 pad 0.61)
  Top 0.152: v80.77,47.59 74.3,47.59 73.41,46.7 70.99,46.7 70.48,47.21 RAM3.4 63.37,47.21 62.23,46.07 58.55,46.07 58.04,46.58 54.36,46.58 53.72,47.21 RAM2.4 48.26,47.21 47.62,46.58 v42.16,46.58 36.58,46.58 35.94,47.21 RAM1.4 27.81,47.21 27.18,46.58 18.8,46.58 18.16,47.21 RAM0.4 | SNES_ADDR1.15 v26.29,32.73
  Bottom 0.152: v80.77,47.59 81.03,47.34 81.03,34.38 80.77,34.13 80.77,33.24 80.52,32.99 72.39,32.99 72.14,32.73 53.21,32.73 52.96,32.48 49.78,32.48 49.53,32.73 v26.29,32.73 | IC11.12 41.78,44.54 42.16,44.93 v42.16,46.58
A13  (via drill 0.3, 0.3 pad 0.61)
  Top 0.152: v80.26,49.37 72.14,49.37 71.88,49.12 63.37,49.12 62.99,49.5 59.18,49.5 58.17,48.48 RAM3.28 54.36,48.48 53.72,49.12 44.58,49.12 43.94,48.48 RAM2.28 36.58,48.48 35.94,49.12 27.81,49.12 27.18,48.48 RAM1.28 18.8,48.48 18.16,49.12 10.03,49.12 9.4,48.48 RAM0.28 | v50.67,37.81 51.82,36.67 v51.82,33.11 | SNES_ADDR1.16 v25.02,33.5
  Bottom 0.152: v80.26,49.37 80.26,48.1 80.14,47.97 80.14,47.21 80.26,47.08 80.26,42.51 80.39,42.39 80.39,33.75 80.14,33.5 72.01,33.5 71.63,33.11 v51.82,33.11 26.92,33.11 26.54,33.5 v25.02,33.5 | v50.67,37.81 48.61,39.88 43.94,39.88 43.16,40.66 IC11.11
A14  (via drill 0.3, 0.3 pad 0.61)
  Top 0.152: SNES_ADDR1.17 23.75,33.65 23.37,34.04 v23.37,34.13 | RAM0.3 18.16,45.94 18.8,45.31 27.18,45.31 27.81,45.94 RAM1.3 35.94,45.94 36.58,45.31 v41.02,45.31 47.62,45.31 48.26,45.94 RAM2.3 53.72,45.94 54.36,45.31 62.74,45.31 63.37,45.94 RAM3.3 79.25,45.94 v79.5,46.2
  Bottom 0.152: v79.5,46.2 79.5,42.39 79.88,42 79.88,34.26 79.63,34 71.75,34 71.5,33.75 47.75,33.75 47.62,33.62 46.61,33.62 46.48,33.75 27.05,33.75 26.67,34.13 v23.37,34.13 | IC11.13 40.51,44.8 v41.02,45.31
A15  (via drill 0.3, 0.3 pad 0.61)
  Top 0.152: v78.74,45.31 63.37,45.31 62.74,44.67 RAM3.31 54.36,44.67 53.72,45.31 48.26,45.31 47.62,44.67 RAM2.31 36.58,44.67 35.94,45.31 27.81,45.31 27.18,44.67 RAM1.31 18.8,44.67 18.16,45.31 10.03,45.31 9.4,44.67 RAM0.31 | v33.4,34.38 v33.4,22.7 | v47.12,34.26 v47.12,37.56
  Bottom 0.152: v78.74,45.31 78.74,42.39 78.36,42 78.36,34.64 78.11,34.38 71.5,34.38 71.37,34.26 57.4,34.26 57.28,34.38 47.24,34.38 v47.12,34.26 46.99,34.38 35.18,34.38 34.92,34.13 34.04,34.13 33.78,34.38 v33.4,34.38 | IC11.14 39.24,39.46 39.37,39.34 45.34,39.34 v47.12,37.56 | SNES_LO.11 33.27,22.57 v33.4,22.7 34.04,23.34 42.42,23.34 42.8,22.95 42.8,18.89 43.05,18.64 46.61,18.64 46.86,18.89 SNES_HI.11
A16  (via drill 0.3, 0.3 pad 0.61)
  Top 0.152: v77.98,43.53 76.83,44.67 RAM3.2 63.37,44.67 62.9,44.2 58.29,44.2 58.13,44.04 54.36,44.04 53.72,44.67 RAM2.2 48.26,44.67 47.62,44.04 36.58,44.04 35.94,44.67 RAM1.2 27.81,44.67 27.18,44.04 18.8,44.04 18.16,44.67 RAM0.2 | v34.54,22.7 v34.54,34.89 | v58.04,34.89 v58.04,38.83
  Bottom 0.152: v77.98,43.53 77.98,42.51 77.85,42.39 77.85,35.02 77.6,34.77 58.17,34.77 v58.04,34.89 36.32,34.89 36.2,34.77 35.31,34.77 35.18,34.89 v34.54,34.89 | v58.04,38.83 IC12.16 | v34.54,22.7 SNES_LO.12 34.54,18.13 34.8,17.87 47.75,17.87 48.13,18.26 SNES_HI.12
A17  (via drill 0.3, 0.3 pad 0.61)
  Top 0.152: v77.22,46.83 76.71,46.32 70.87,46.32 70.61,46.58 63.37,46.58 62.48,45.69 58.29,45.69 58.04,45.94 RAM3.30 54.36,45.94 53.72,46.58 48.26,46.58 47.62,45.94 RAM2.30 36.58,45.94 35.94,46.58 27.81,46.58 27.18,45.94 RAM1.30 18.8,45.94 18.16,46.58 10.03,46.58 9.4,45.94 RAM0.30 | v35.81,35.4 v35.81,22.7 | v59.31,35.4 v59.31,38.83
  Bottom 0.152: v77.22,46.83 77.22,42.89 77.47,42.64 77.47,35.65 77.22,35.4 v59.31,35.4 58.67,35.4 58.55,35.53 57.53,35.53 57.28,35.27 35.94,35.27 v35.81,35.4 | v59.31,38.83 IC12.15 | v35.81,22.7 SNES_LO.13 35.81,18.51 36.07,18.26 47.12,18.26 47.5,18.64 47.5,22.32 47.62,22.45 49.28,22.45 49.4,22.32 SNES_HI.13
A18  (via drill 0.3, 0.3 pad 0.61)
  Top 0.152: 52.45,42.64 34.67,42.64 | 34.67,42.64 16.89,42.64 16.13,43.4 RAM0.1 | 52.45,42.64 57.78,42.64 58.55,43.4 RAM3.1 v76.45,43.4 | 52.45,42.64 51.69,43.4 RAM2.1 | 34.67,42.64 33.91,43.4 RAM1.1 | v37.08,22.7 v37.08,35.91 | v56.77,35.91 v56.77,38.83 | v50.67,35.91 50.04,35.27 v50.04,19.65
  Bottom 0.152: v37.08,35.91 37.34,35.65 38.86,35.65 39.12,35.91 v50.67,35.91 50.93,35.65 56.64,35.65 56.77,35.78 v56.77,35.91 58.8,35.91 58.93,36.04 76.83,36.04 77.09,36.29 77.09,42.13 76.45,42.77 v76.45,43.4 | v56.77,38.83 IC12.17 | SNES_LO.14 v37.08,22.7 | v50.04,19.65 50.67,20.29 SNES_HI.14
A19  (via drill 0.3, 0.3 pad 0.61)
  Top 0.152: v38.35,22.7 v38.35,36.42 37.56,37.21 23.37,37.21 21.59,35.43 21.59,31.24 19.65,29.3 RAM_CS_DEMUX.1 | v55.5,36.42 v55.5,38.83 | v51.94,19.65 51.31,19.02 49.4,19.02 48.77,19.65 44.35,19.65 44.07,19.94 42.8,19.94 42.51,19.65 v38.35,19.65
  Bottom 0.152: v38.35,36.42 38.48,36.29 40.01,36.29 40.13,36.42 50.16,36.42 50.29,36.54 51.05,36.54 51.18,36.42 v55.5,36.42 55.63,36.54 | v55.5,38.83 IC12.18 | v38.35,22.7 SNES_LO.15 v38.35,19.65 | v51.94,19.65 SNES_HI.15
A20  (via drill 0.3, 0.3 pad 0.61)
  Top 0.152: v39.62,22.7 v39.62,36.92 38.83,37.72 23.11,37.72 21.21,35.81 21.21,31.62 20.16,30.57 RAM_CS_DEMUX.2 | v53.21,19.65 53.21,20.16 52.83,20.54 51.56,20.54 51.31,20.8 51.31,25.24 53.09,27.02 53.09,37.43 v52.7,37.81
  Bottom 0.152: v39.62,36.92 51.82,36.92 v52.7,37.81 52.74,37.85 62.48,37.85 63.12,38.48 IC12.12 | v39.62,22.7 SNES_LO.16 | v53.21,19.65 SNES_HI.16
A21  (via drill 0.3)
  Top 0.152: v67.94,38.83 67.94,28.42 65.53,26 55.88,26 53.85,23.97 53.85,20.29 v54.48,19.65 | 40.04,38.1 22.86,38.1 20.83,36.07 20.83,31.88 20.45,31.5 14.1,31.5 13.75,31.84 RAM_CS_DEMUX.3 | 40.04,38.1 41.02,39.08 v51.56,39.08 | v40.89,22.7 40.89,37.24 40.04,38.1
  Bottom 0.152: v51.56,39.08 51.94,38.7 53.09,38.7 53.59,38.19 62.1,38.19 62.48,38.58 62.48,41.88 62.99,42.39 v64.39,42.39 IC12.11 64.39,39.34 64.9,38.83 v67.94,38.83 | v40.89,22.7 SNES_LO.17 | v54.48,19.65 SNES_HI.17
AVR/SNES_SW  (via drill 0.3, 0.3 pad 0.3)
  Top 0.152: v97.28,21.05 97.28,22.32 96.39,23.21 94.74,23.21 94.49,23.46 94.49,28.03 91.28,31.24 90.17,31.24 85.26,36.15 84.71,36.15 IC1.14 81.42,36.15 80.77,36.8 77.22,36.8 76.45,36.04 | v99.69,21.05 98.93,20.29 IC9.19 | 76.45,36.04 76.45,31.46 74.17,29.18 74.17,21.72 74.58,21.3 NAND.2 | v76.45,37.94 76.45,36.04 | v44.83,47.12 v47.37,47.12 | v76.45,41.66 75.34,42.77 68.07,42.77 66.83,41.53 63.75,41.53 62.77,42.51 v59.44,42.51 | NAND.2 NAND.1 | NAND.4 77.06,18.76 77.22,18.92 77.22,21.08 76.96,21.34 75.83,21.34 NAND.2
  Bottom 0.152: v97.28,21.05 v99.69,21.05 | IC10.19 11.56,41.88 12.19,42.51 32.19,42.51 32.89,41.81 32.89,41.27 | 32.89,41.78 32.89,41.88 | 32.89,41.27 IC11.19 | 32.89,41.27 32.89,41.78 | 32.89,41.78 32.89,46.45 34.04,47.59 44.35,47.59 v44.83,47.12 | 54.23,42.77 53.98,43.02 53.98,46.23 52.7,47.5 49.53,47.5 49.15,47.12 v47.37,47.12 | 54.23,42.77 IC12.19 | 54.23,42.77 59.18,42.77 v59.44,42.51 | v76.45,41.66 v76.45,37.94
AVR/SNES_SW_INV  (via drill 0.3)
  Top 0.152: SNES_ADDR0.19 v46.86,24.35 42.42,24.35 42.04,23.97 42.04,21.97 41.37,21.3 37.34,21.3 36.23,20.19 21.21,20.19 | v62.48,24.86 61.59,23.97 SNES_CTRL.19 61.59,20.03 61.98,19.65 v70.61,19.65 | OR.6 20.57,19.56 21.21,20.19 | 21.21,20.19 SNES_ADDR1.19
  Bottom 0.152: v71.12,24.61 70.61,25.11 62.74,25.11 v62.48,24.86 62.36,24.73 58.42,24.73 57.66,23.97 52.2,23.97 51.82,24.35 v46.86,24.35 | v70.61,19.65 SNES_DATA.19
AVR_ADDR_DWN  (via drill 0.3)
  Top 0.152: IC1.20 81.55,31.35 v81.41,31.21 | v74.8,31.21 74.8,38.7 72.26,41.24 68.58,41.24 67.6,40.26 58.8,40.26 57.31,41.75 15.24,41.75 14.86,42.13 v5.59,42.13 | v11.68,53.31 11.68,52.04 11.3,51.66 v5.84,51.66
  Bottom 0.152: v11.68,53.31 11.56,53.31 11.3,53.56 AVR_ADDR_CNT0.4 | v5.84,51.66 5.84,42.39 v5.59,42.13 | v74.8,31.21 v81.41,31.21
AVR_ADDR_LATCH  (via drill 0.3, 0.3 pad 0.3)
  Top 0.152: IC1.25 86.37,31.58 v85.98,31.97 | v16.13,69.6 v37.34,69.6 58.55,69.6 v58.8,69.34 | v69.22,64.26 v77.09,64.26
  Bottom 0.152: AVR_ADDR_SREG2.12 v58.8,69.34 58.8,68.83 59.44,68.2 63.75,68.2 64.77,67.18 64.77,65.66 65.02,65.4 68.07,65.4 v69.22,64.26 | v16.13,69.6 AVR_ADDR_SREG0.12 | v37.34,69.6 AVR_ADDR_SREG1.12 | v85.98,31.97 85.98,51.56 83.44,54.1 83.44,56.9 81.79,58.55 81.79,63.75 81.28,64.26 v77.09,64.26
AVR_ADDR_LOAD  (via drill 0.3)
  Top 0.152: v8.76,63.09 9.02,63.34 19.43,63.34 19.68,63.59 v22.86,63.59 27.94,63.59 28.32,63.21 v30.1,63.21 30.99,64.1 42.67,64.1 43.31,63.47 43.05,63.47 v43.18,63.59 | v51.44,63.72 64.01,63.72 | 64.01,63.72 v64.64,63.09 | IC1.21 79.78,30.55 79.25,31.08 79.25,33.11 79.76,33.62 v81.41,33.62 | v80.9,63.5 66.58,63.5 66.36,63.72 64.01,63.72
  Bottom 0.152: AVR_ADDR_CNT0.11 v8.76,63.09 | v22.86,63.59 22.48,63.21 19.68,63.21 19.43,62.96 AVR_ADDR_CNT1.11 | v30.1,63.21 AVR_ADDR_CNT2.11 | 43.81,62.58 41.02,62.58 40.77,62.32 AVR_ADDR_CNT3.11 | 43.81,62.58 43.94,62.45 43.94,59.15 44.2,58.9 50.93,58.9 51.44,59.4 AVR_ADDR_CNT4.11 v51.44,63.72 | v43.18,63.59 43.81,62.96 43.81,62.58 | v64.64,63.09 62.61,63.09 62.1,62.58 AVR_ADDR_CNT5.11 | v81.41,33.62 81.41,62.99 v80.9,63.5
AVR_ADDR_SCK  (via drill 0.3, 0.3 pad 0.3)
  Top 0.152: IC1.24 85.57,28.82 85.22,29.18 77.47,29.18 77.34,29.05 v77.34,28.54 | v57.53,73.02 v36.07,73.02 v14.86,73.02 6.6,73.02 5.97,72.39 v5.97,67.69
  Bottom 0.152: v77.34,28.54 52.07,28.54 51.69,28.92 49.15,28.92 48.51,28.29 47.62,28.29 47.37,28.54 30.1,28.54 29.72,28.16 27.94,28.16 21.72,34.38 12.95,34.38 7.75,39.59 4.06,39.59 2.92,40.73 2.92,61.05 4.45,62.58 4.45,66.17 v5.97,67.69 | v14.86,73.02 AVR_ADDR_SREG0.11 | v57.53,73.02 AVR_ADDR_SREG2.11 | v36.07,73.02 AVR_ADDR_SREG1.11
AVR_ADDR_SER  (via drill 0.3)
  Top 0.152: IC1.23 84.16,27.95 83.99,27.78 v78.74,27.78
  Bottom 0.152: v78.74,27.78 78.49,27.53 76.07,27.53 75.95,27.65 51.82,27.65 51.69,27.53 33.66,27.53 33.4,27.78 31.75,27.78 31.24,27.27 28.19,27.27 21.46,34 12.83,34 7.62,39.21 3.81,39.21 2.54,40.48 2.54,65.79 5.33,68.58 9.27,68.58 9.65,68.96 18.41,68.96 18.67,69.21 AVR_ADDR_SREG0.14
AVR_ADDR_UP  (via drill 0.3)
  Top 0.152: IC1.19 80.82,32.15 v80.56,31.89 | v75.69,31.89 75.69,38.58 72.64,41.62 68.33,41.62 67.34,40.64 59.05,40.64 57.56,42.13 15.62,42.13 14.99,42.77 2.03,42.77 1.78,43.02 1.78,52.67 2.03,52.93 9.65,52.93 v10.03,53.31
  Bottom 0.152: v10.03,53.31 AVR_ADDR_CNT0.5 | v75.69,31.89 v80.56,31.89 | v80.56,31.89
AVR_CS/  (via drill 0.3 pad 0.3)
  Top 0.152: IC1.40 94.61,34.51 94.64,34.54 v97.16,34.54 | 15.62,33.27 15.62,33.03 R_CS.1 v17.4,32.89 | v100.58,61.72 100.58,65.66 97.41,68.83 96.27,68.83 95.63,69.47 95.63,70.87 94.49,72.01 90.81,72.01 90.3,71.5 90.3,69.47 89.66,68.83 82.93,68.83 81.79,69.98 81.79,71.5 81.28,72.01 69.09,72.01 67.31,70.23 13.97,70.23 13.72,70.48 9.4,70.48 v8.38,69.47
  Bottom 0.152: v97.16,34.54 97.16,36.58 101.22,40.64 101.22,61.09 v100.58,61.72 | v8.38,69.47 4.32,69.47 2.16,67.31 2.16,40.26 3.56,38.86 7.37,38.86 13.34,32.89 v17.4,32.89
AVR_D0
  Top 0.152: IC1.37 98.41,32.15 98.93,31.62 IC9.2
AVR_D1
  Top 0.152: IC1.36 97.17,31.35 97.66,30.86 IC9.3
AVR_D2
  Top 0.152: IC9.4 96.39,30.1 95.94,30.55 IC1.35
AVR_D3
  Top 0.152: IC1.34 94.57,29.22 95.12,28.67 IC9.5
AVR_D4
  Top 0.152: IC1.33 92.77,27.08 93.85,26 IC9.6
AVR_D5
  Top 0.152: IC1.32 91.97,27.12 92.58,26.51 IC9.7
AVR_D6
  Top 0.152: IC1.31 91.17,26.52 91.31,26.38 IC9.8
AVR_D7
  Top 0.152: IC1.30 90.42,27.9 90.42,26.76 90.04,26.38 IC9.9
AVR_D+
  Bottom 0.152: R_USB_PD+.2 86.36,66.9 ZD_D+.C 86.72,66.93 89.15,66.93 89.76,66.32 R_AVR_D+.1 90.68,67.56 91.06,67.94 X1.3
AVR_D-
  Bottom 0.152: R_USB_PU-.1 86.36,68.93 ZD_D-.C 86.79,68.83 89.15,68.83 89.79,69.47 90.64,69.47 R_AVR_D-.1 91.47,68.71 93.6,68.71 | 93.6,68.71 93.74,68.71 | X1.2 93.63,68.74 93.6,68.71
AVR_RD/  (via drill 0.3)
  Top 0.152: v60.58,47.59 v60.58,48.86 | v71.25,47.34 73.41,47.34 74.3,48.23 81.41,48.23 81.92,48.74 85.47,48.74 85.98,49.24 v92.84,49.24 | v92.84,36.16 92.85,36.15 IC1.42 99.61,36.15 100.2,35.56 IC9.1
  Bottom 0.152: v60.58,47.59 70.99,47.59 v71.25,47.34 | v92.84,49.24 v92.84,36.16 | v60.58,48.86 IC12.7
AVR_SNES_WR_EN
  Top 0.152: IC1.16 82.94,34.51 81.41,34.51 80.39,35.53 78.49,35.53 77.47,34.51 77.47,31.21 75.82,29.56 75.82,24.86 79.38,21.3 NAND.13
AVR_UART_RX  (via drill 0.3)
  Top 0.152: IC1.9 86.37,40.88 85.6,41.66 82.55,41.66 81.41,40.51 76.33,40.51 v75.18,41.66 | v86.23,55.75 86.36,55.88 88.14,55.88 89.41,54.61 89.92,54.61 95.12,59.82 v95.12,60.07
  Bottom 0.152: v75.18,41.66 75.18,64.13 75.95,64.9 81.28,64.9 82.17,64.01 82.17,60.83 86.23,56.77 v86.23,55.75 | v95.12,60.07 95,60.2 95,61.21 95.38,61.59 95.89,61.59 98.3,59.18 98.3,54.48 SV2.5
AVR_UART_TX  (via drill 0.3)
  Top 0.152: IC1.10 85.57,40.79 85.09,41.27 82.8,41.27 81.66,40.13 75.69,40.13 v74.17,41.66 | v82.8,63.25 83.19,62.86 89.41,62.86 90.55,64.01 v96.65,64.01
  Bottom 0.152: v74.17,41.66 74.17,63.63 75.82,65.28 81.41,65.28 82.8,63.88 v82.8,63.25 | v96.65,64.01 97.54,63.12 97.54,60.71 98.81,59.44 98.81,56.51 SV2.7
AVR_WR/  (via drill 0.3)
  Top 0.152: v70.99,44.04 76.83,44.04 77.09,43.78 77.09,43.15 77.47,42.77 78.49,42.77 79.12,43.4 79.12,44.8 82.68,48.35 v91.31,48.35 | v91.31,35.27 91.39,35.35 IC1.41
  Bottom 0.152: v70.99,44.04 70.99,46.2 70.23,46.96 59.69,46.96 59.31,47.34 IC12.6 | v91.31,48.35 v91.31,35.27
CS/  (via drill 0.3 pad 0.3, 0.3 pad 0.61)
  Top 0.152: SNES_CTRL.13 v69.22,30.35 v69.22,40.48 | RAM_CS_DEMUX.4 RAM_CS_DEMUX.5 12.72,34.42 15.31,34.42 R_CS.2 15.49,37.72 17.78,40 49.15,40 52.07,40 53.98,38.1 53.98,32.38 v56.01,30.35
  Bottom 0.152: v56.01,30.35 v69.22,30.35
CS_RAM0
  Top 0.152: RAM_CS_DEMUX.15 4.86,30.57 3.56,31.88 3.56,33.27 1.4,35.43 1.4,56.01 1.52,56.13 3.3,56.13 RAM0.22
CS_RAM1  (via drill 0.3 pad 0.3)
  Top 0.152: v19.18,56.39 19.43,56.13 21.05,56.13 21.05,56.1 RAM1.22 | v13.08,48.01 5.21,48.01 v5.08,47.88 | v4.45,41.53 4.45,32.38 4.99,31.84 RAM_CS_DEMUX.14
  Bottom 0.152: v19.18,56.39 18.8,56.01 18.8,53.47 17.27,51.94 17.27,48.39 16.89,48.01 v13.08,48.01 | v5.08,47.88 5.08,42.93 4.45,42.29 v4.45,41.53
CS_RAM2  (via drill 0.3 pad 0.3)
  Top 0.152: v37.08,56.39 37.37,56.1 RAM2.22 | v30.73,67.06 29.46,68.33 8.13,68.33 4.7,64.9 1.27,64.9 1.02,64.64 1.02,34.67 v2.54,33.15 | RAM_CS_DEMUX.13 8.22,33.11 v8.26,33.15
  Bottom 0.152: v37.08,56.39 37.08,56.77 36.2,57.66 32.77,57.66 30.73,59.69 v30.73,67.06 | v2.54,33.15 v8.26,33.15
CS_RAM3  (via drill 0.3 pad 0.3)
  Top 0.152: v54.86,56.51 55.28,56.1 RAM3.22 | v46.48,40.89 6.73,40.89 4.95,39.12 4.95,34.67 5.21,34.42 6.55,34.42 RAM_CS_DEMUX.12
  Bottom 0.152: v54.86,56.51 54.61,56.26 54.61,53.59 54.23,53.21 52.45,53.21 52.07,53.59 52.07,56.01 51.56,56.51 48.51,56.51 48.01,56.01 48.01,49.4 46.48,47.88 v46.48,40.89
D0  (via drill 0.3, 0.3 pad 0.3)
  Top 0.152: IC9.18 97.66,13.05 97.41,12.79 88.39,12.79 88.01,13.18 v88.01,18.26 | v95.63,60.96 94.74,60.96 93.34,59.56 90.93,59.56 90.71,59.78 72.14,59.78 70.99,58.64 RAM3.13 63.37,58.64 62.74,59.28 54.48,59.28 53.85,58.64 RAM2.13 44.58,58.64 43.94,59.28 36.7,59.28 36.07,58.64 RAM1.13 27.81,58.64 27.18,59.28 18.8,59.28 18.16,58.64 RAM0.13
  Bottom 0.152: v88.01,18.26 96.01,18.26 96.27,18.51 96.27,24.26 96.01,24.51 96.01,60.58 v95.63,60.96 | v88.01,18.26 88.01,18.29 87.76,18.54 | SNES_DATA.11 60.45,16.73 60.71,16.48 74.42,16.48 76.45,18.51 87.76,18.51 v88.01,18.26
D1  (via drill 0.3, 0.3 pad 0.3)
  Top 0.152: v95.5,22.32 96.39,21.43 IC9.17 | v94.74,61.85 94.74,61.59 94.36,61.21 91.6,61.21 91.19,60.8 71.88,60.8 70.99,59.91 RAM3.14 63.37,59.91 62.74,60.55 54.48,60.55 53.85,59.91 RAM2.14 44.58,59.91 43.94,60.55 36.7,60.55 36.07,59.91 RAM1.14 27.81,59.91 27.18,60.55 18.8,60.55 18.16,59.91 RAM0.14
  Bottom 0.152: SNES_DATA.12 61.72,17.37 62.23,16.86 74.17,16.86 76.2,18.89 95.25,18.89 95.5,19.14 v95.5,22.32 95.5,56.9 94.36,58.04 94.36,61.21 94.74,61.59 v94.74,61.85
D2  (via drill 0.3, 0.3 pad 0.3)
  Top 0.152: v94.74,21.18 95.12,20.8 IC9.16 | v93.85,61.85 91.19,61.85 91.06,61.98 71.75,61.98 70.99,61.21 | 70.99,61.21 70.96,61.18 | RAM0.15 18.16,61.18 18.8,61.82 27.18,61.82 27.81,61.18 RAM1.15 36.07,61.18 36.7,61.82 43.94,61.82 44.58,61.18 RAM2.15 53.85,61.18 54.48,61.82 62.74,61.82 63.37,61.18 RAM3.15 70.99,61.18 70.99,61.21
  Bottom 0.152: SNES_DATA.13 62.99,17.62 63.37,17.24 73.91,17.24 75.95,19.27 94.49,19.27 94.74,19.53 v94.74,21.18 94.74,56.9 93.85,57.78 v93.85,61.85
D3  (via drill 0.3, 0.3 pad 0.3)
  Top 0.152: 56.13,62.32 54.36,62.32 53.85,61.82 44.58,61.82 43.94,62.45 RAM2.17 36.7,62.45 36.07,61.82 27.81,61.82 27.18,62.45 23.88,62.45 23.75,62.32 23.11,62.32 22.99,62.45 RAM1.17 18.8,62.45 18.16,61.82 10.03,61.82 9.4,62.45 RAM0.17 | 56.13,62.32 56.52,62.32 | IC9.15 93.85,22.19 v93.98,22.32 | v91.57,62.48 91.53,62.45 71.63,62.45 70.99,61.82 63.37,61.82 62.74,62.45 RAM3.17 56.13,62.45 56.13,62.32
  Bottom 0.152: SNES_DATA.14 64.26,17.87 64.52,17.62 73.66,17.62 75.69,19.65 93.73,19.65 93.98,19.91 v93.98,22.32 94.11,22.45 94.11,56.9 93.22,57.78 93.22,61.72 92.84,62.1 91.95,62.1 v91.57,62.48
D4  (via drill 0.3 pad 0.3)
  Top 0.152: v92.58,20.45 IC9.14 | v90.68,61.34 71.75,61.34 70.99,60.58 63.37,60.58 62.77,61.18 RAM3.18 54.48,61.18 53.85,60.55 44.58,60.55 43.94,61.18 RAM2.18 36.7,61.18 36.07,60.55 27.81,60.55 27.18,61.18 RAM1.18 18.8,61.18 18.16,60.55 10.03,60.55 9.4,61.18 RAM0.18
  Bottom 0.152: SNES_DATA.15 65.53,18.41 65.91,18.03 73.41,18.03 75.82,20.45 v92.58,20.45 92.96,20.83 92.96,22.73 93.6,23.37 93.6,56.9 92.84,57.66 92.84,61.09 92.58,61.34 v90.68,61.34
D5  (via drill 0.3, 0.3 pad 0.3)
  Top 0.152: v91.31,21.05 IC9.13 | v91.69,60.29 72.01,60.29 70.99,59.28 63.37,59.28 62.74,59.91 RAM3.19 54.48,59.91 53.85,59.28 44.58,59.28 43.94,59.91 RAM2.19 36.7,59.91 36.07,59.28 27.81,59.28 27.18,59.91 RAM1.19 18.8,59.91 18.16,59.28 10.03,59.28 9.4,59.91 RAM0.19
  Bottom 0.152: SNES_DATA.16 66.8,18.89 67.31,18.38 73.15,18.38 75.82,21.05 v91.31,21.05 92.2,21.05 92.46,21.3 92.46,35.53 92.2,35.78 92.2,36.54 92.46,36.8 92.46,48.74 92.2,48.99 92.2,49.62 92.46,49.88 92.46,58.93 91.69,59.69 v91.69,60.29
D6  (via drill 0.3)
  Top 0.152: v91.69,58.39 91.31,58.39 90.55,59.15 72.14,59.15 70.99,58.01 63.37,58.01 62.74,58.64 RAM3.20 54.48,58.64 53.85,58.01 44.58,58.01 43.94,58.64 RAM2.20 36.7,58.64 36.07,58.01 27.81,58.01 27.18,58.64 RAM1.20 18.8,58.64 18.16,58.01 10.03,58.01 9.4,58.64 RAM0.20 | v90.04,21.81 IC9.12
  Bottom 0.152: v91.69,58.39 91.69,48.86 91.95,48.61 91.95,47.34 91.69,47.08 91.69,35.78 91.95,35.53 91.95,22.45 91.31,21.81 v90.04,21.81 75.95,21.81 72.9,18.76 68.33,18.76 68.07,19.02 SNES_DATA.17
D7  (via drill 0.3)
  Top 0.152: 62.78,57.32 63.37,56.74 70.99,56.74 72.14,57.88 89.28,57.88 90.17,56.99 v90.93,56.99 | 62.78,57.32 62.74,57.37 | v88.77,22.57 IC9.11 | RAM0.21 9.4,57.37 10.03,56.74 18.16,56.74 18.8,57.37 RAM1.21 27.18,57.37 27.81,56.74 36.07,56.74 36.7,57.37 RAM2.21 43.94,57.37 44.58,56.74 53.85,56.74 54.48,57.37 RAM3.21 62.78,57.37 62.78,57.32
  Bottom 0.152: v90.93,56.99 90.93,49.24 90.55,48.86 90.55,47.47 90.93,47.08 90.93,35.91 90.68,35.65 90.68,34.77 91.44,34 91.44,23.21 90.81,22.57 v88.77,22.57 72.39,22.57 72.01,22.95 69.6,22.95 69.34,22.7 SNES_DATA.18
GND  (via drill 0.3, 0.3 pad 0.3)
  Top 0.152: v44.58,63.09 45.21,63.09 | v32.26,14.06 32.26,14.19 | v79.12,34.77 79.25,34.64 | v23.5,62.96 23.62,62.96 | v65.66,63.09 65.41,63.09 | v66.55,42.77 66.29,42.77 | v18.03,12.03 18.03,11.91 | v61.59,13.56 61.59,13.68 | v12.57,62.61 12.45,62.61
  Top 1.676: 23.88,5.08 23.88,9.27
  Bottom 0.152: v32.26,14.06 32.28,14.04 | 37.34,48.99 37.34,52.42 | 54.58,62.96 v54.61,62.96 | 26.77,50.54 26.86,50.45 26.82,50.49 26.82,50.54 | 28.89,48.42 C_BUF1.1 | 50.16,48.74 50.35,48.74 C_BUF2.1 50.73,48.35 | IC10.10 21.89,50.54 | 7.75,48.23 7.87,48.35 7.94,48.35 C_BUF0.1 8.19,48.23 | 15.88,48.86 16,48.99 16,52.67 | 6.22,54.83 AVR_ADDR_CNT0.8 | 84.02,71.25 S1.2 | 45.97,43.37 45.97,43.56 45.66,43.56 C_BUF3.1 | C_BUF4.1 71.19,56.83 | 61.21,49.37 61.21,52.07 | 59.56,53.72 AVR_ADDR_CNT5.8
  Bottom 0.305: 23.88,10.38 23.88,14.32 v24.38,14.83 | v79.12,41.24 v79.12,37.56 v79.12,34.77 | v88.27,32.1 v88.27,35.65 | 26.82,50.54 27.56,51.28 AVR_ADDR_CNT2.8 | AVR_ADDR_CNT4.8 48.9,51.53 50.16,50.26 50.16,48.74 | v54.61,62.96 54.99,63.34 AVR_ADDR_SREG2.8 | AVR_ADDR_CNT3.8 38.23,53.31 37.34,52.42 | 43.31,48.74 37.59,48.74 37.34,48.99 36.76,48.42 C_BUF1.1 | 43.31,48.74 43.05,48.99 IC11.10 | 61.21,49.37 61.85,48.74 64.14,48.74 64.39,48.99 | 64.39,48.99 64.64,48.74 65.66,48.74 70.36,53.43 C_BUF4.1 | AVR_ADDR_CNT0.8 6.22,56.48 v6.35,56.61 | C_FTDI_3.4.1 32.32,18.06 33.27,17.11 33.27,15.08 v32.26,14.06 32.26,12.08 SNES_LO.10 | C_CNT0.1 4.32,55.59 5.08,54.83 6.22,54.83 | 12.06,47.59 12.57,47.08 20.7,47.08 21.72,48.1 IC10.10 | 12.06,47.59 12.06,48.48 12.45,48.86 15.88,48.86 | AVR_ADDR_CNT0.14 v12.57,62.61 12.57,62.71 12.32,62.96 AVR_ADDR_SREG0.8 | AVR_ADDR_CNT1.14 23.24,62.71 v23.5,62.96 | AVR_ADDR_CNT2.14 33.91,62.83 33.53,63.21 v33.53,63.5 AVR_ADDR_SREG1.8 33.53,67.31 34.8,68.58 38.1,68.58 38.61,69.09 AVR_ADDR_SREG1.13 | AVR_ADDR_CNT3.14 v44.58,63.09 | AVR_ADDR_CNT4.14 55.24,62.3 54.58,62.96 | AVR_ADDR_CNT5.14 65.91,62.83 v65.66,63.09 | v66.55,42.77 67.18,43.4 67.18,45.43 66.55,46.07 59.05,46.07 56.77,48.35 50.73,48.35 | v13.97,22.19 CIC.4 | 26.86,50.45 28.89,48.42 | 21.89,50.54 26.77,50.54 | 64.39,48.99 IC12.10 | 7.75,48.23 6.73,48.23 6.35,47.85 v6.35,41.5 7.59,41.5 8,41.91 C_BUF7.1 | 12.06,47.59 9.91,47.59 9.27,48.23 8.19,48.23 | SNES_DATA.10 60.45,12.79 61.21,13.56 v61.59,13.56 | C_FTDI_3.5.1 67.12,23.84 v68.58,23.84 | 16,52.67 16.89,53.56 AVR_ADDR_CNT1.8 | ZD_D-.A 84.86,71.16 S1.2 | ZD_D+.A 84.86,64.66 S1.1
  Bottom 0.305: R_USB_PD+.1 79.03,66.9 78.74,67.18 78.74,70.87 79.12,71.25 84.02,71.25 | v60.07,69.34 AVR_ADDR_SREG2.13 | AVR_ADDR_SREG0.13 17.4,72.77 17.65,73.02 22.73,73.02 v23.5,72.26 | 45.97,43.56 45.97,47.88 45.12,48.74 43.31,48.74 | SNES_HI.10 46.86,9.27 v46.1,8.51 | X1.5 95.43,66.34 v96.9,67.82 | C2_595.1 46.17,69.15 v46.74,68.58 | C1_595.1 24.96,69.15 25.91,68.2 v25.91,67.18 | C3_595.1 64.33,69.15 v64.14,69.34 | v67.44,64.23 67.98,64.23 72.14,60.07 72.14,57.78 71.19,56.83 | C_BUF8.1 v50.67,40.89 | 61.21,52.07 59.56,53.72 | 24,10.29 22.26,12.03 v18.03,12.03 CIC.8
  Bottom 0.406: v73.53,24.76 v74.8,24.76 | v77.34,24.26 v79.38,24.26 | 23.88,10.38 23.84,10.35 U$3.5
  pour Top: 103,0.13 103,74.14 -0.13,74.14 -0.08,-0.05
HI/LOROM_SW  (via drill 0.3)
  Top 0.152: IC1.15 81.46,35.35 80.77,36.04 77.98,36.04 76.96,35.02 76.96,31.34 76.58,30.96 | 76.58,30.96 76.2,30.57 | 76.58,30.96 75.44,29.81 75.44,24.73 77.6,22.57 77.6,18.64 77.12,18.16 | NAND.5 75.79,17.6 76.56,17.6 77.12,18.16 | v18.67,26.54 v22.48,26.54 | v10.67,14.48 OR.2 | v59.31,22.7 58.42,21.81 58.42,19.05 59.09,18.38 73.69,18.38 73.91,18.16 77.12,18.16
  Bottom 0.152: v59.31,22.7 58.93,23.08 57.94,23.08 57.78,23.24 44.64,23.24 43.5,24.38 31.24,24.38 28.57,21.72 26.54,21.72 23.75,24.51 23.75,25.27 v22.48,26.54 | v18.67,26.54 18.67,19.3 18.03,18.67 18.03,16.26 17.65,15.87 14.48,15.87 13.08,14.48 v10.67,14.48
HI/LOROM_SW_INV  (via drill 0.3)
  Top 0.152: v22.48,25.27 9.91,25.27 9.65,25.02 9.65,21.34 9.14,20.83 OR.8
  Bottom 0.152: v57.02,19.14 SNES_HI.19 57.02,22.61 56.77,22.86 44.45,22.86 43.31,24 31.37,24 28.7,21.34 26.42,21.34 v22.48,25.27
ISP_MISO
  Top 0.152: IC1.2 91.97,40.63 92.08,40.73 95.5,40.73 96.01,41.24 96.01,51.69 SV2.6
ISP_MOSI
  Top 0.152: IC1.1 96.06,39.55 97.28,40.77 97.28,45.72 98.55,46.99 98.55,49.15 SV2.4
ISP_RST
  Top 0.152: IC1.4 90.37,40.94 91.19,41.75 95,41.75 95.25,42 95.25,50.26 | C_RST.2 94.74,50.77 95.25,50.26 | 91.57,64.64 96.9,64.64 97.28,64.26 SV2.10 95.25,56.01 95.25,50.26 | 91.57,64.64 88.64,64.64 S1.3 | 91.57,64.64 92.46,65.53 92.46,66.96 92.71,66.96 R_RST.1
ISP_SCK
  Top 0.152: IC1.3 91.17,41.1 91.31,41.24 95.25,41.24 95.63,41.62 95.63,53.85 SV2.8
LED  (via drill 0.3 pad 0.3)
  Top 0.152: IC1.26 87.17,26.92 86.92,26.67 85.34,26.67 85.09,26.42 v85.09,17.4 | R_LED1.1 75.09,66.9 LED1.A 77.85,66.8 78.49,67.44 90.81,67.44 91.19,67.82 91.19,70.74 91.44,70.99 93.98,70.99 94.49,70.48 94.49,69.09 96.65,66.93 97.16,66.93 98.81,65.28 98.81,51.94 99.06,51.69 100.46,51.69 101.35,50.8 101.35,47.62 100.58,46.86 v100.58,36.83
  Bottom 0.152: v85.09,17.4 85.34,17.14 97.16,17.14 100.58,20.57 v100.58,36.83
MMC_CS  (via drill 0.3 pad 0.3)
  Top 0.152: IC1.44 97.95,37.75 98.55,38.35 v98.55,45.08
  Bottom 0.152: v98.55,45.08 98.55,46.61 SV2.2
N1337  (via drill 0.3)
  Top 0.152: v43.43,19.3 43.18,19.05 37.34,19.05 36.7,18.41 26.16,18.41 25.91,18.67 21.34,18.67 18.41,15.75 OR.3
  Bottom 0.152: v43.43,19.3 SNES_LO.19
N$1
  Bottom 0.152: AVR_ADDR_CNT0.7 7.49,53.18 8.64,52.04 11.43,52.04 11.56,51.91 IC10.2
N$2
  Bottom 0.152: AVR_ADDR_CNT2.3 33.91,53.56 35.43,52.04 IC11.4
N$3
  Bottom 0.152: AVR_ADDR_CNT0.2 13.84,53.31 15.37,51.78 IC10.5
N$4
  Bottom 0.152: AVR_ADDR_CNT0.3 12.57,53.56 14.1,52.04 IC10.4
N$5
  Bottom 0.152: AVR_ADDR_CNT1.7 18.16,53.31 16.64,51.78 IC10.6
N$6
  Bottom 0.152: AVR_ADDR_CNT1.6 19.43,53.56 17.91,52.04 IC10.7
N$7
  Bottom 0.152: AVR_ADDR_CNT1.2 24.51,53.69 23.11,52.29 20.95,52.29 20.45,51.78 IC10.9
N$8
  Bottom 0.152: AVR_ADDR_CNT1.3 23.24,53.56 22.48,52.8 20.07,52.8 19.18,51.91 IC10.8
N$9
  Bottom 0.152: AVR_ADDR_CNT0.12 10.03,58.13 10.92,57.24 19.81,57.24 20.7,56.36 AVR_ADDR_CNT1.5
N$10
  Bottom 0.152: AVR_ADDR_CNT0.13 11.3,58.39 12.06,57.63 20.7,57.63 21.97,56.36 AVR_ADDR_CNT1.4
N$11  (via drill 0.3 pad 0.3)
  Top 0.152: v39.88,68.71 13.21,68.71 v12.32,69.6
  Bottom 0.152: v39.88,68.71 AVR_ADDR_SREG1.14 | v12.32,69.6 AVR_ADDR_SREG0.9
N$12
  Bottom 0.152: AVR_ADDR_CNT0.15 13.84,62.86 12.95,63.75 12.95,67.56 13.59,68.2 19.43,68.2 19.94,68.71 AVR_ADDR_SREG0.15
N$13  (via drill 0.3 pad 0.3)
  Top 0.152: v10.41,66.8 17.14,66.8 18.03,67.69 20.32,67.69 v21.21,66.8
  Bottom 0.152: v10.41,66.8 10.41,63.59 9.4,62.58 9.4,57.5 10.03,56.86 14.61,56.86 15.11,56.36 AVR_ADDR_CNT0.1 | v21.21,66.8 AVR_ADDR_SREG0.1
N$14  (via drill 0.3, 0.3 pad 0.3)
  Top 0.152: v19.94,66.8 19.94,65.02 18.92,64.01 7.53,64.01 v7.49,63.98